# EAGLE board BBB_TVbNull (EAGLE 5.11)
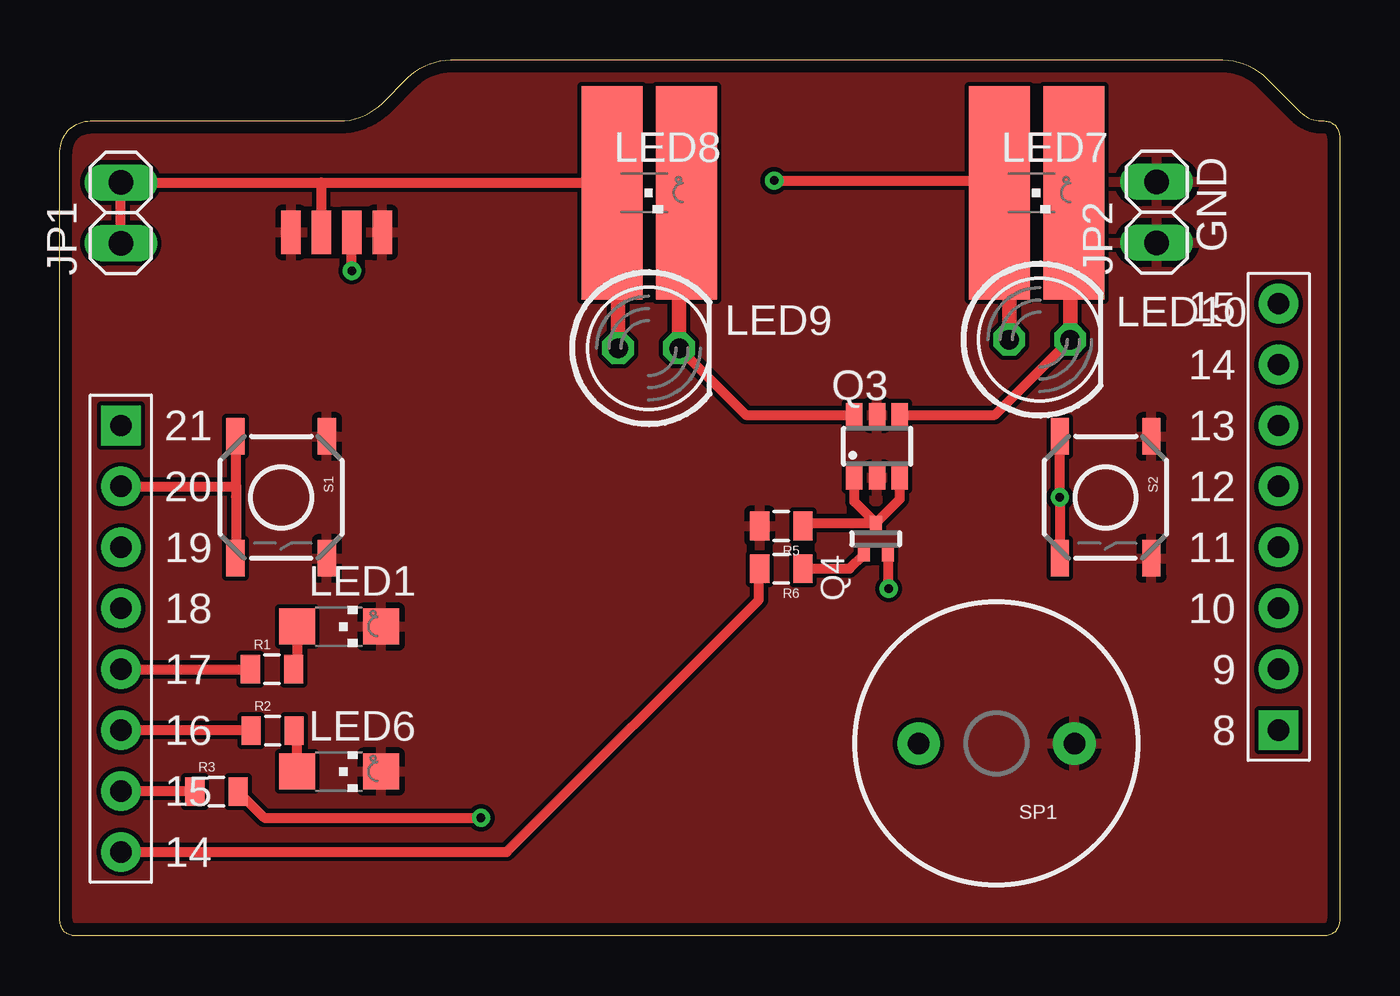
[diagram p0: board, top side]
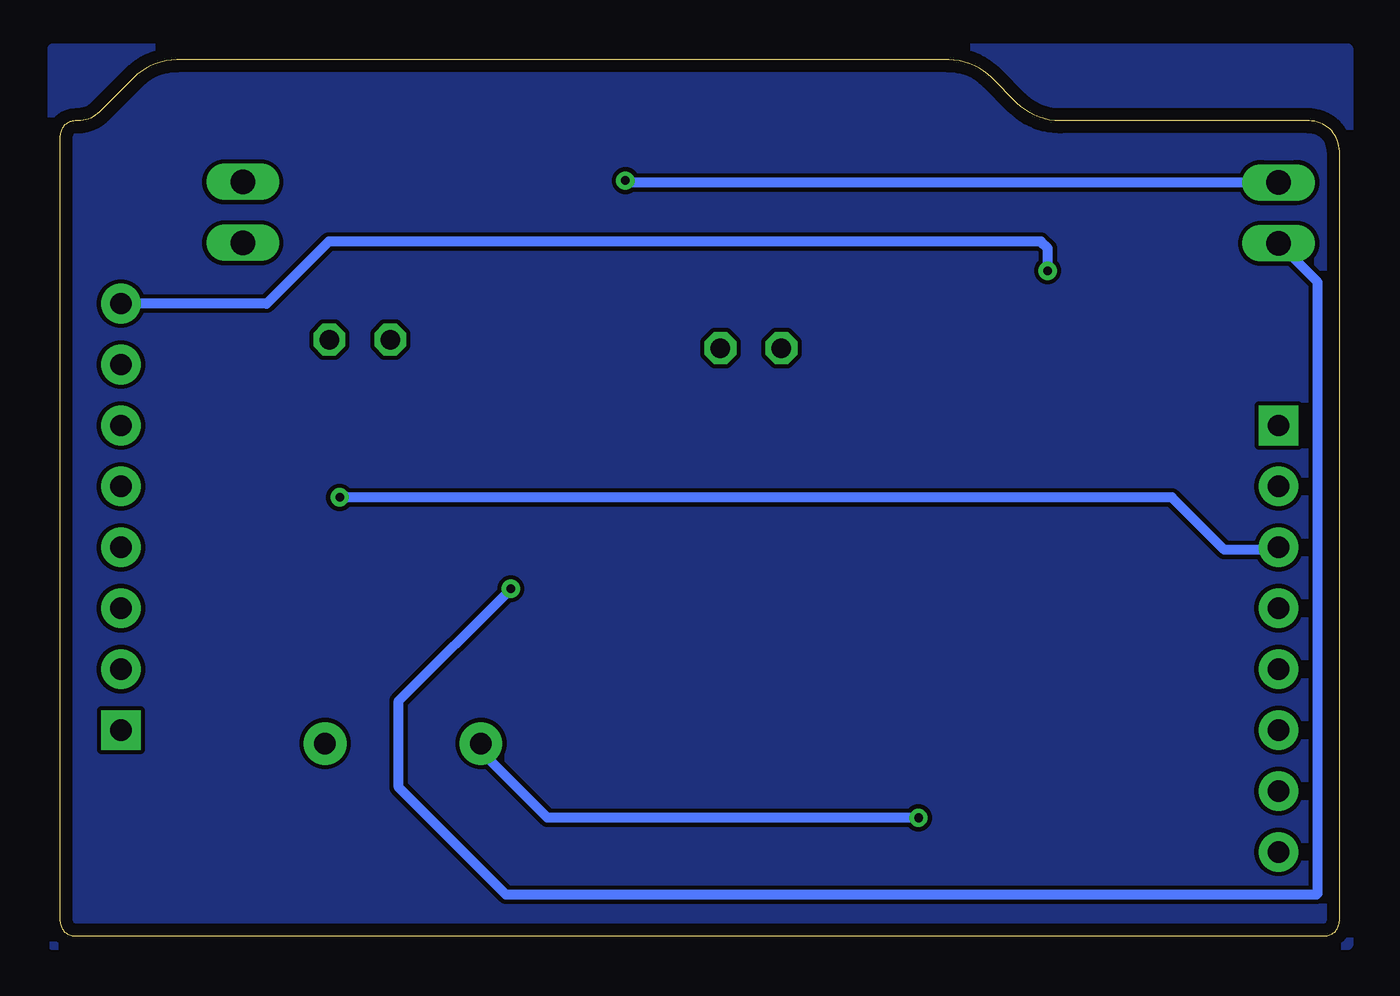
[diagram p1: board, bottom side, seen from below]

Size 53.34 x 36.53 mm. Coordinates in mm from the lower left corner, seen from the top.
Outline: 52.71,33.98 arc-90 53.34,33.35 53.34,0.64 arc-90 52.71,0 0.64,0 arc-90 0,0.64 0,32.72 arc-90 1.27,33.98 11.65,33.98 arc45 13.44,34.73 14.5,35.78 arc-45 16.29,36.52 48.48,36.52 arc-45 50.27,35.78 51.7,34.36 arc45 52.6,33.98 52.71,33.98
Copper layers (1*16): Top 0.0356mm / dielectric 1.5011mm / Bottom 0.0356mm
Design rules "SilverCircuits *": minimum track width 8mil, minimum drill 14mil, track to track 7mil, track to pad 7mil, pad to pad 7mil, via to via 7mil, smd to smd 0mil, copper to edge 20mil, drill to drill 8mil, minimum pad ring 10mil, minimum via ring 8mil, stop-mask expansion 4mil, vias tented up to drill 0mil, thermal gap 10mil

## Footprints (pad centres in the part's own frame; a part is rotated, then mirrored left to right if it is on the bottom)
CK_1X8 = drill 0.889 pad 1.651 square: 1 0,8.89 | drill 0.889 pad 1.651 round: 2 0,6.35; 3 0,3.81; 4 0,1.27; 5 0,-1.27; 6 0,-3.81; 7 0,-6.35; 8 0,-8.89
1X02 = drill 1.016 long: 1 -1.27,0; 2 1.27,0
CHIPLED_1206 = smd 1.5 x 1.5: A 0,-1.75; C 0,1.75
SIDE_IR_NSL = smd 2.54 x 8.89: A -1.547,0; C 1.547,0
LED5MM = drill 0.813 octagon: A -1.27,0; K 1.27,0
SSOT6 = smd 0.69 x 0.99: 1 -0.95,-1.3; 2 0,-1.3; 3 0.95,-1.3; 4 0.95,1.3; 5 0,1.3; 6 -0.95,1.3
SOT416 = smd 0.6 x 0.5: 1 -0.65,0; 2 0.65,-0.5; 3 0.65,0.5
0805 = smd 0.8 x 1.2: 1 -0.9,0; 2 0.9,0
TACTILE_SWITCH_SMD = smd 1.524 x 0.762: 1 -2.54,1.905; 2 2.54,1.905; 3 -2.54,-1.905; 4 2.54,-1.905
BUZZER-12MM = drill 0.9 pad 1.778 round: + 3.25,0; - -3.25,0
IR-RCV = smd 0.8 x 1.8: P$1 -1.27,0; P$2 0,0; P$3 1.27,0; P$4 2.54,0

## Placement (x,y rotation side)
INTERFACE  2.54 female 8p  [CK_1X8]  2.54,12.4 0 top
J6  2.54 female 8p  [CK_1X8]  50.8,17.48 180 top
JP1  [1X02]  2.54,30.15 90 top
JP2  [1X02]  45.72,30.18 90 top
LED1  [CHIPLED_1206]  11.63,12.9 270 top
LED6  [CHIPLED_1206]  11.63,6.86 270 top
LED7  [SIDE_IR_NSL]  40.72,30.99 0 top
LED8  [SIDE_IR_NSL]  24.56,30.99 0 top
LED9  [LED5MM]  24.54,24.51 0 top
LED10  [LED5MM]  40.84,24.87 0 top
Q3  FMB2222A  [SSOT6]  34.06,20.42 0 top
Q4  BC857AT115  [SOT416]  34.01,16.56 270 top
R1  1.5K  [0805]  8.84,11.13 0 top
R2  1.5K  [0805]  8.86,8.56 0 top
R3  1K  [0805]  6.53,6.02 0 top
R5  10K  [0805]  30.07,17.09 180 top
R6  1K  [0805]  30.07,15.32 180 top
S1  SWITCH  [TACTILE_SWITCH_SMD]  9.22,18.29 270 top
S2  SWITCH  [TACTILE_SWITCH_SMD]  43.59,18.29 270 top
SP1  BUZZERPTH  [BUZZER-12MM]  39.04,8.03 180 top
U$2  IR-RCV  [IR-RCV]  10.9,29.34 0 top

## Library data of the parts
INTERFACE J6 = Connector
JP1 JP2 = pinhead
LED1 LED6 = minimidi
LED7 LED8 = tvbgone3
LED9 LED10 = led
Q3 = fairchild-semic
Q4 = zetex
R1-R3 R5 R6 S1 S2 SP1 = SparkFun
U$2 = IR-rcv

## Nets
ADC8: J6.1
ADC9: J6.2
ADC10: J6.3
ADC11: J6.4
ADC12: J6.5
ADC13: J6.6
ADC14: J6.7
ADC15: J6.8 U$2.P$3
GND: JP2.1 JP2.2 LED1.C LED6.C Q3.2 Q3.5 R5.2 S1.1 S1.2 S2.1 S2.2 SP1.- U$2.P$1 U$2.P$4
N$2: R3.2 SP1.+
N$3: LED6.A R2.2
N$4: LED1.A R1.2
N$9: Q3.1 Q3.3 Q4.1 R5.1
N$10: Q4.2 R6.1
N$11: LED7.C LED10.K Q3.4
N$12: LED8.C LED9.K Q3.6
PD1/SDA: INTERFACE.2 S1.3 S1.4
PD2/RX1: INTERFACE.3 S2.3 S2.4
PD3/TX1: INTERFACE.4
PH0/XD2: INTERFACE.5 R1.1
PH1/TXD2: INTERFACE.6 R2.1
PJ0/RXD3: INTERFACE.7 R3.1
PJ1/TXD3: INTERFACE.8 R6.2
VCC: JP1.1 JP1.2 LED7.A LED8.A LED9.A LED10.A Q4.3 U$2.P$2

## Tracks (layer width: path | path; a pad name or v marks a point on that pad's centre or on a via)
ADC15  (via drill 0.36)
  Top 0.406: v12.17,27.74 U$2.P$3
  Bottom 0.406: J6.8 44.73,26.37 42.14,28.96 12.45,28.96 12.17,28.68 v12.17,27.74
GND
  pour Top: 0.23,0.03 52.73,0.03 arc90 53.37,0.66 53.37,36.6 0.2,36.6 0.2,0.03
N$1
  pour Bottom: -0.36,-0.38 53.64,-0.38 53.64,37.01 -0.36,37.01
N$2  (via drill 0.36)
  Top 0.406: R3.2 8.52,4.93 v17.55,4.93
  Bottom 0.406: v17.55,4.93 33.02,4.93 35.79,7.7 SP1.+
N$3
  Top 0.406: LED6.A 9.88,8.44 R2.2
N$4
  Top 0.305: R1.2 9.71,11.16
  Top 0.406: LED1.A 9.88,11.27 R1.2
N$9
  Top 0.305: R5.1 31.09,17.21
  Top 0.406: Q4.1 35.01,18.21 Q3.3 | Q3.1 33.11,18.11 Q4.1 | 31.09,17.21 Q4.1
N$10
  Top 0.406: Q4.2 32.92,15.32 R6.1
N$11
  Top 0.406: Q3.4 38.97,21.72 LED10.K
  Top 0.61: LED10.K 42.11,31.5 42.19,31.57 42.14,31.57 42.11,31.6 42.11,31.14 LED7.C
N$12
  Top 0.406: Q3.6 28.6,21.72 LED9.K
  Top 0.61: LED8.C 25.81,30.94 LED9.K
PD1/SDA
  Top 0.406: S1.4 7.34,15.77 7.34,18.31 7.34,18.8 | 7.34,18.8 7.29,18.74 INTERFACE.2 | S1.3 7.34,20.8 7.34,18.8
PD2/RX1  (via drill 0.36)
  Top 0.406: S2.3 v41.68,18.29 S2.4
  Bottom 0.406: v41.68,18.29 6.99,18.29 4.8,16.1 2.64,16.1 INTERFACE.3
PH0/XD2
  Top 0.406: INTERFACE.5 R1.1
PH1/TXD2
  Top 0.305: 7.94,8.59 R2.1
  Top 0.406: INTERFACE.6 7.94,8.59
PJ0/RXD3
  Top 0.406: INTERFACE.7 5.6,6.05 R3.1
PJ1/TXD3
  Top 0.406: INTERFACE.8 18.62,3.5 29.13,14.02 29.13,15.28 R6.2
VCC  (via drill 0.36)
  Top 0.406: LED8.A 22.53,31.42 10.9,31.42 | 10.9,31.42 JP1.2 JP1.1 | 10.9,31.42 U$2.P$2 | v29.77,31.5 39.19,31.5 | 39.19,31.5 39.29,31.6 | 39.19,31.5 39.19,31.01 LED7.A | v34.54,14.48 34.54,15.88 Q4.3
  Top 0.61: LED8.A 23.27,30.94 LED9.A | LED10.A 39.57,30.58 LED7.A
  Bottom 0.406: v29.77,31.5 29.77,31.42 JP1.2 | JP1.1 0.91,27.25 0.91,1.78 0.97,1.73 34.75,1.73 39.22,6.2 39.22,9.8 v34.54,14.48

## Text on the board
tPlace: GND | 15 | 14 | 21 | 13 | 20 | 12 | 19 | 11 | 18 | 10 | 17 | 9 | 16 | 8 | 15 | 14